# Altium PCB 发光公交卡奥迪4.PcbDoc
Units mil, origin at the board's own origin, x right, y up, seen from the top; angles counter-clockwise.
Board outline 6000 x 4000 mil, 2 copper layers (Top Layer, Bottom Layer); 4 components, 0 nets, 156 pads, 2 vias.
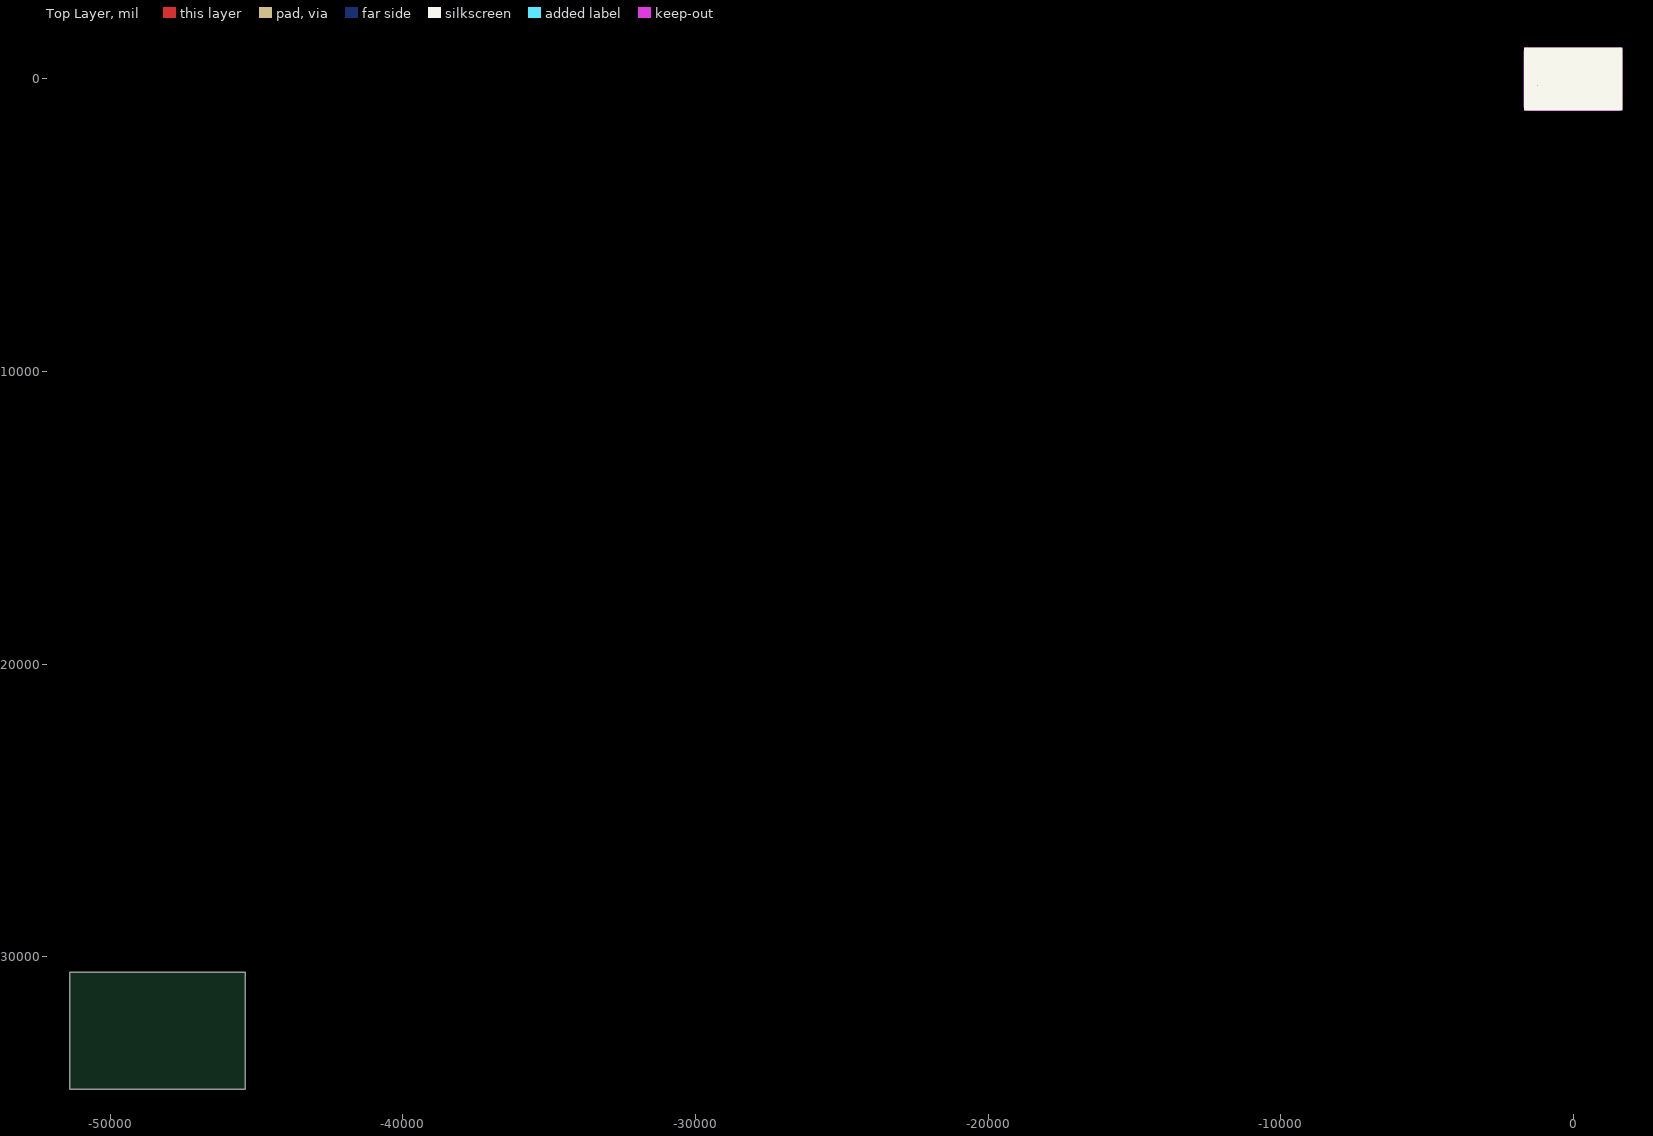
[diagram p0: Top Layer view]
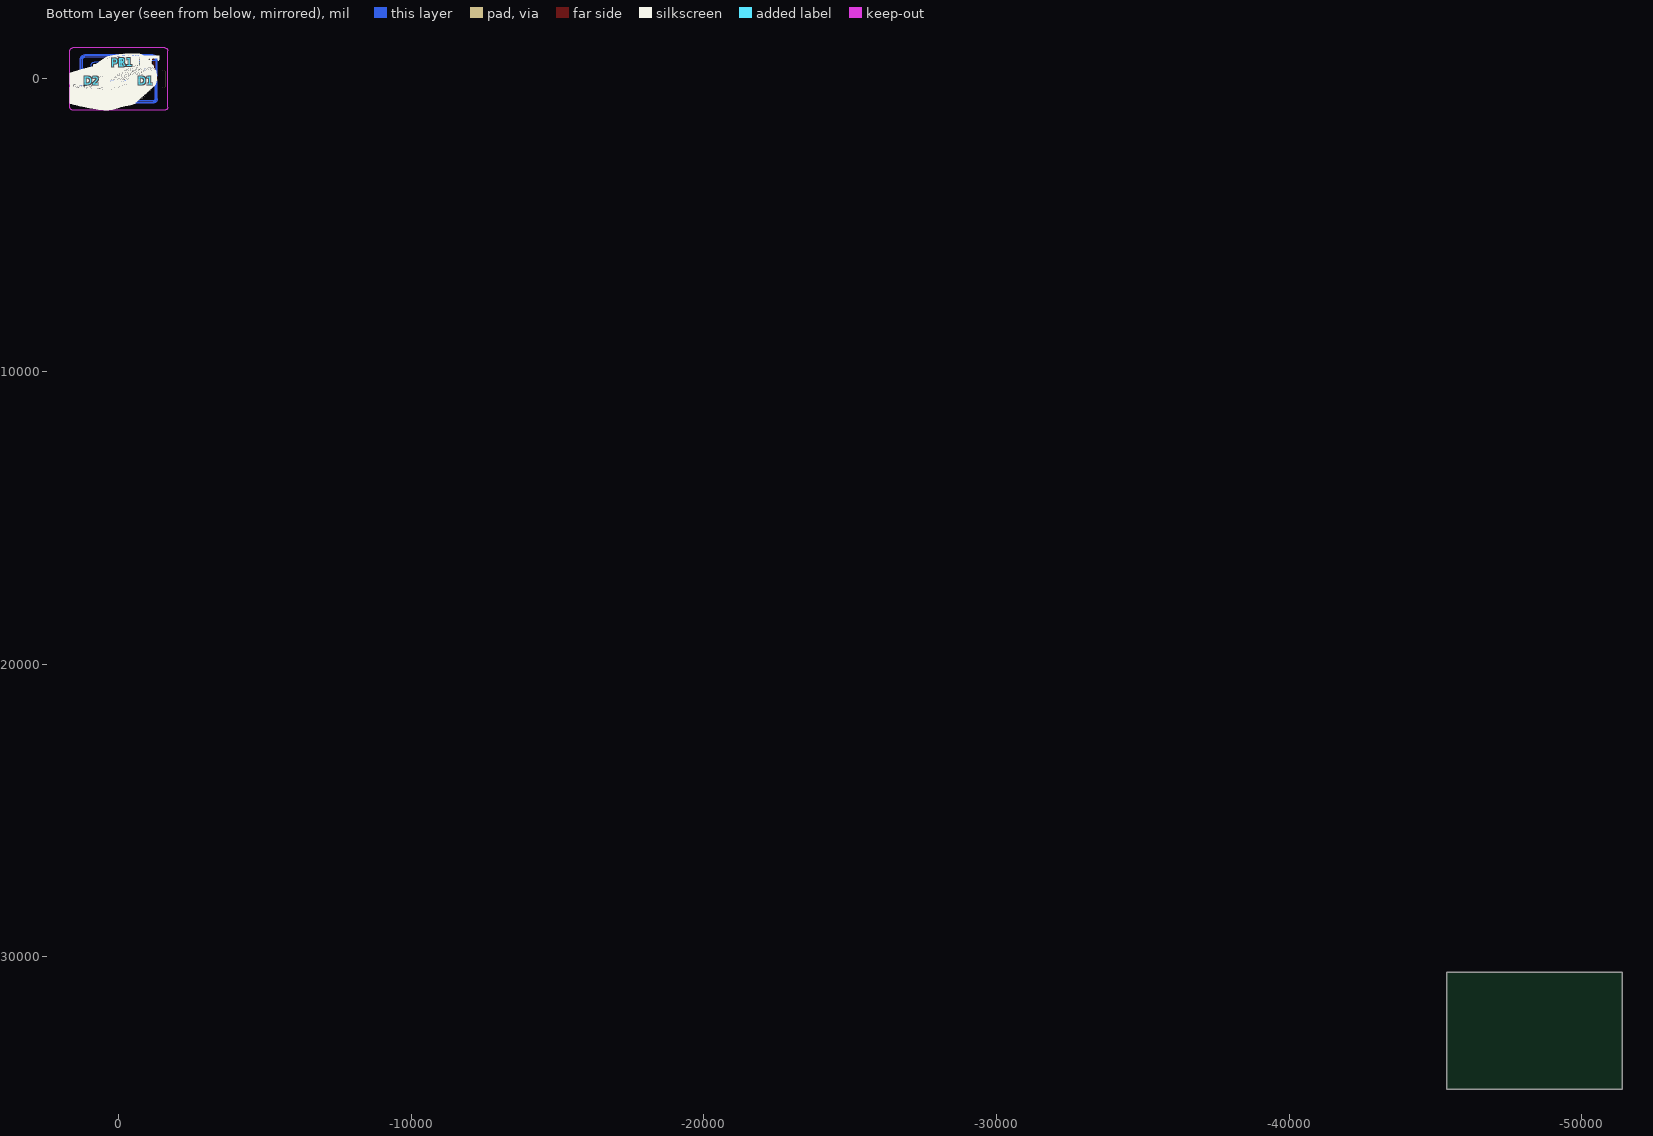
[diagram p1: Bottom Layer view, seen from below]

## Layer stack, top to bottom
Top Solder: solder mask 0.4, Solder Resist, Dk 3.5
Top Layer: signal copper 1.4
Dielectric1: dielectric 12.6, FR-4, Dk 4.8
Bottom Layer: signal copper 1.4
Bottom Solder: solder mask 0.4, Solder Resist, Dk 3.5

## Board outline
-51385,-34540 -45385,-34540 -45385,-30540 -51385,-30540

## Design rules (kind name [scope] priority, off if disabled: settings)
Clearance [All] p1: gap=10
PolygonConnect [All] p1: connectstyle=Relief reliefconductorwidth=10 reliefentries=4 polygonreliefangle="90 Angle" airgapwidth=10
RoutingVias [All] p1: holewidth=28 width=50 viastyle="Through Hole" minholewidth=28 minwidth=50 maxholewidth=28 maxwidth=50
SilkToSolderMaskClearance SilkscreenOverComponentPads [IsPad] p1: minsilkscreentomaskgap=10 clearancetoexposedcopper=TRUE
SolderMaskExpansion [All] p1: expansion=4
Width [All] p1: maxlimit=100 minlimit=10 preferedwidth=10 minimp=50.000000 maximp=50.000000 favimp=50.000000
29 further rules are at their usual default settings.

## Components (designator, comment, footprint, x,y, rotation, side; value= is the part's Value field where it differs from the comment)
D1 "LED2" LED_0603_EMBED -940,-65 r0 bottom
D2 "LED2" LED_0603_EMBED 905,-65 r0 bottom
P1 "Header 2" NFC_8*5 0,560 r0 bottom
R1 "Res1" LED_0603_EMBED -260,565 r90 bottom

## Footprints (in the part's own frame and the unit in brackets; to place one, negate y for a bottom-side part, rotate by r counter-clockwise, add the part's x,y. Pads: shape width x height; smd on the part's side, far side on the other; paste and mask are expansions set on the pad)
LED_0603_EMBED [mm]
  round 0.4 hole 0.4: 0(-0.635,-0.254) 0(-0.635,0) 0(-0.635,0.254) 0(-0.381,-0.254) 0(-0.381,0) 0(-0.381,0.254) 0(-0.127,-0.254) 0(-0.127,0.254) 0(0,0) 0(0.127,-0.254) 0(0.127,0.254) 0(0.254,0) 0(0.381,-0.254) 0(0.381,0.254) 0(0.635,-0.254) 0(0.635,0) 0(0.635,0.254)
  rect 0.8x0.8 smd: 1(-0.889,0) 2(0.889,0)
NFC_8*5 [mm]
  round 0.4 hole 0.4: 0(-3.81,-2.286) 0(-3.81,-2.032) 0(-3.81,-1.778) 0(-3.81,-1.524) 0(-3.81,-1.27) 0(-3.81,-1.016) 0(-3.81,-0.762) 0(-3.81,-0.508) 0(-3.81,-0.254) 0(-3.81,0) 0(-3.81,0.254) 0(-3.81,0.508) 0(-3.81,0.762) 0(-3.81,1.016) 0(-3.81,1.27) 0(-3.81,1.524) 0(-3.81,1.778) 0(-3.81,2.032) 0(-3.81,2.286) 0(-3.556,-2.286) 0(-3.556,2.286) 0(-3.302,-2.286) 0(-3.302,2.286) 0(-3.048,-2.286) 0(-3.048,2.286) 0(-2.794,-2.286) 0(-2.794,2.286) 0(-2.54,-2.286) 0(-2.54,2.286) 0(-2.286,-2.286) 0(-2.286,2.286) 0(-2.032,-2.286) 0(-2.032,2.286) 0(-1.778,-2.286) 0(-1.778,2.286) 0(-1.524,-2.286) 0(-1.524,2.286) 0(-1.27,-2.286) 0(-1.27,2.286) 0(-1.016,-2.286) 0(-1.016,2.286) 0(-0.762,-2.286) 0(-0.762,2.286) 0(-0.508,-2.286) 0(-0.508,2.286) 0(-0.254,-2.286) 0(-0.254,2.286) 0(0,-2.286) 0(0,2.286) 0(0.254,-2.286) 0(0.254,2.286) 0(0.508,-2.286) 0(0.508,2.286) 0(0.762,-2.286) 0(0.762,2.286) 0(1.016,-2.286) 0(1.016,2.286) 0(1.27,-2.286) 0(1.27,2.286) 0(1.524,-2.286) 0(1.524,2.286) 0(1.778,-2.286) 0(1.778,2.286) 0(2.032,-2.286) 0(2.032,2.286) 0(2.286,-2.286) 0(2.286,2.286) 0(2.54,-2.286) 0(2.54,2.286) 0(2.794,-2.286) 0(2.794,2.286) 0(3.048,-2.286) 0(3.048,2.286) 0(3.302,-2.286) 0(3.302,2.286) 0(3.556,-2.286) 0(3.556,2.286) 0(3.81,-2.286) 0(3.81,-2.032) 0(3.81,-1.778) 0(3.81,-1.524) 0(3.81,-1.27) 0(3.81,-1.016) 0(3.81,-0.762) 0(3.81,-0.508) 0(3.81,-0.254) 0(3.81,0) 0(3.81,0.254) 0(3.81,0.508) 0(3.81,0.762) 0(3.81,1.016) 0(3.81,1.27) 0(3.81,1.524) 0(3.81,1.778) 0(3.81,2.032) 0(3.81,2.286)
  rect 2x5 smd: 1(-4.4,0) 2(4.4,0)
  silkscreen extent -4,-2.5 4,2.5

## Free pads (board coordinates)
  oval 118.11x590.55 hole 118.11 slot 590.55 at 90 deg: 0(-1535.43,0)

## Via types
v1: diameter 31.5, hole 15.75, Top Layer to Bottom Layer, 2 vias

## Nets (pads, with @x,y where several pads share a name; then routed paths per layer and width w, separated by ;. In a path a pad name is that pad's centre, name@x,y a point inside that pad or via, vN(x,y) a via of type N, cw(c..) or ccw(c..) an arc to the next point about the centre after c; other vN are vias at no path point)
pads on no net: D1.0 D1.1 D1.2 D2.0 D2.1 D2.2 P1.0 P1.1 P1.2 R1.0 R1.1 R1.2
copper on no net: | length 57506.8
  Top Layer w31.5: v1(-1318.9,-39.36) -1318.9,669.31 cw(c-1161.42,669.31) -1161.42,826.79 1161.42,826.79 cw(c1161.42,669.31) 1318.9,669.31 1318.9,-669.28 cw(c1161.42,-669.28) 1161.42,-826.76 -1161.44,-826.79 ; -1240.16,-669.28 ccw(c-1161.42,-669.28) -1161.42,-748.02 1161.42,-748.02 ccw(c1161.42,-669.28) 1240.16,-669.28 1240.16,669.31 ccw(c1161.42,669.31) 1161.42,748.05 -1161.41,748.05 ccw(c-1161.42,669.31) -1240.16,669.31 -1240.16,-78.72 -1279.53,-118.09 -1279.53,-669.28 ccw(c-1161.42,-669.28) -1161.42,-787.39 1161.42,-787.38 ccw(c1161.42,-669.28) 1279.53,-669.28 1279.53,669.31 ccw(c1161.42,669.31) 1161.42,787.42 -1161.41,787.42 ccw(c-1161.42,669.31) -1279.53,669.31 -1279.53,-59.04 -1318.9,-98.41 -1318.9,-669.28 ccw(c-1161.42,-669.28) -1161.42,-826.76 ; -1240.17,-669.26 -1240.17,-140.17 -1200,-100 -1200,580 ; -1200,455 -1200,600 cw(c-1100,600) -1100,700 v1(173.23,700)
  Bottom Layer w10: -975,-65 ccw(c-975,-70) -980,-70 -980,-90 ccw(c-965,-90) -965,-105 930,-105 ccw(c930,-95) 940,-95 940,-65 940,480 ccw(c840,480) 840,580 173.23,580 ; -260,530 -805,530 ccw(c-805,430) -905,430 -905,390 -905,-65 870,-65 ; -255,625 ccw(c-255,620) -260,620 -180,620
  Bottom Layer w31.5: v1(-1318.9,-39.36) -1318.9,-669.26 ccw(c-1161.42,-669.26) -1161.42,-826.74 ; -1240.16,669.32 cw(c-1161.42,669.32) -1161.42,748.06 1161.42,748.06 cw(c1161.42,669.32) 1240.16,669.32 1240.16,-669.26 cw(c1161.42,-669.26) 1161.42,-748 -1161.41,-748 cw(c-1161.42,-669.26) -1240.16,-669.26 -1240.16,98.44 -1279.53,137.81 -1279.53,669.32 cw(c-1161.42,669.32) -1161.42,787.43 1161.42,787.43 cw(c1161.42,669.32) 1279.53,669.32 1279.53,-669.26 cw(c1161.42,-669.26) 1161.42,-787.37 -1161.41,-787.37 cw(c-1161.42,-669.26) -1279.53,-669.26 -1279.53,78.76 -1318.9,118.13 -1318.9,669.32 cw(c-1161.42,669.32) -1161.42,826.8 1161.42,826.8 cw(c1161.42,669.32) 1318.9,669.32 1318.9,-669.26 cw(c1161.42,-669.26) 1161.42,-826.74 -1161.44,-826.77 ; -1240.17,669.34 ccw(c-1190.82,669.34) -1190.82,620 -260,620 ; 173.23,580 v1(173.23,700)

## Keep-outs
Keep-Out Layer:
  lines w10: -1575.24,-1062.99 1575,-1062.99 ccw(c1574.8,-964.57) 1673.23,-965 ; -1575.24,1062.99 1575,1062.99 cw(c1574.8,964.57) 1673.23,965 ; -1575,-1062.99 cw(c-1574.8,-964.57) -1673.23,-965 -1673.23,965 cw(c-1574.8,964.57) -1575,1062.99 ; 1673.23,-964.76 1673.23,964.76

## Silkscreen, mask and mechanical layers (free items; w line width, h text height)
Top Overlay:
  drawing of 12566 lines, arcs and shapes, not listed
Bottom Overlay:
  drawing of 39314 lines, arcs and shapes, not listed